# Altium PCB PCB2.PcbDoc
Units mil, origin at the board's own origin, x right, y up, seen from the top; angles counter-clockwise.
Board outline 2225.94 x 1981.76 mil, 2 copper layers (Top Layer, Bottom Layer); 49 components, 58 nets, 197 pads, 41 vias.
Unrouted connection lines stored in the file: 28.
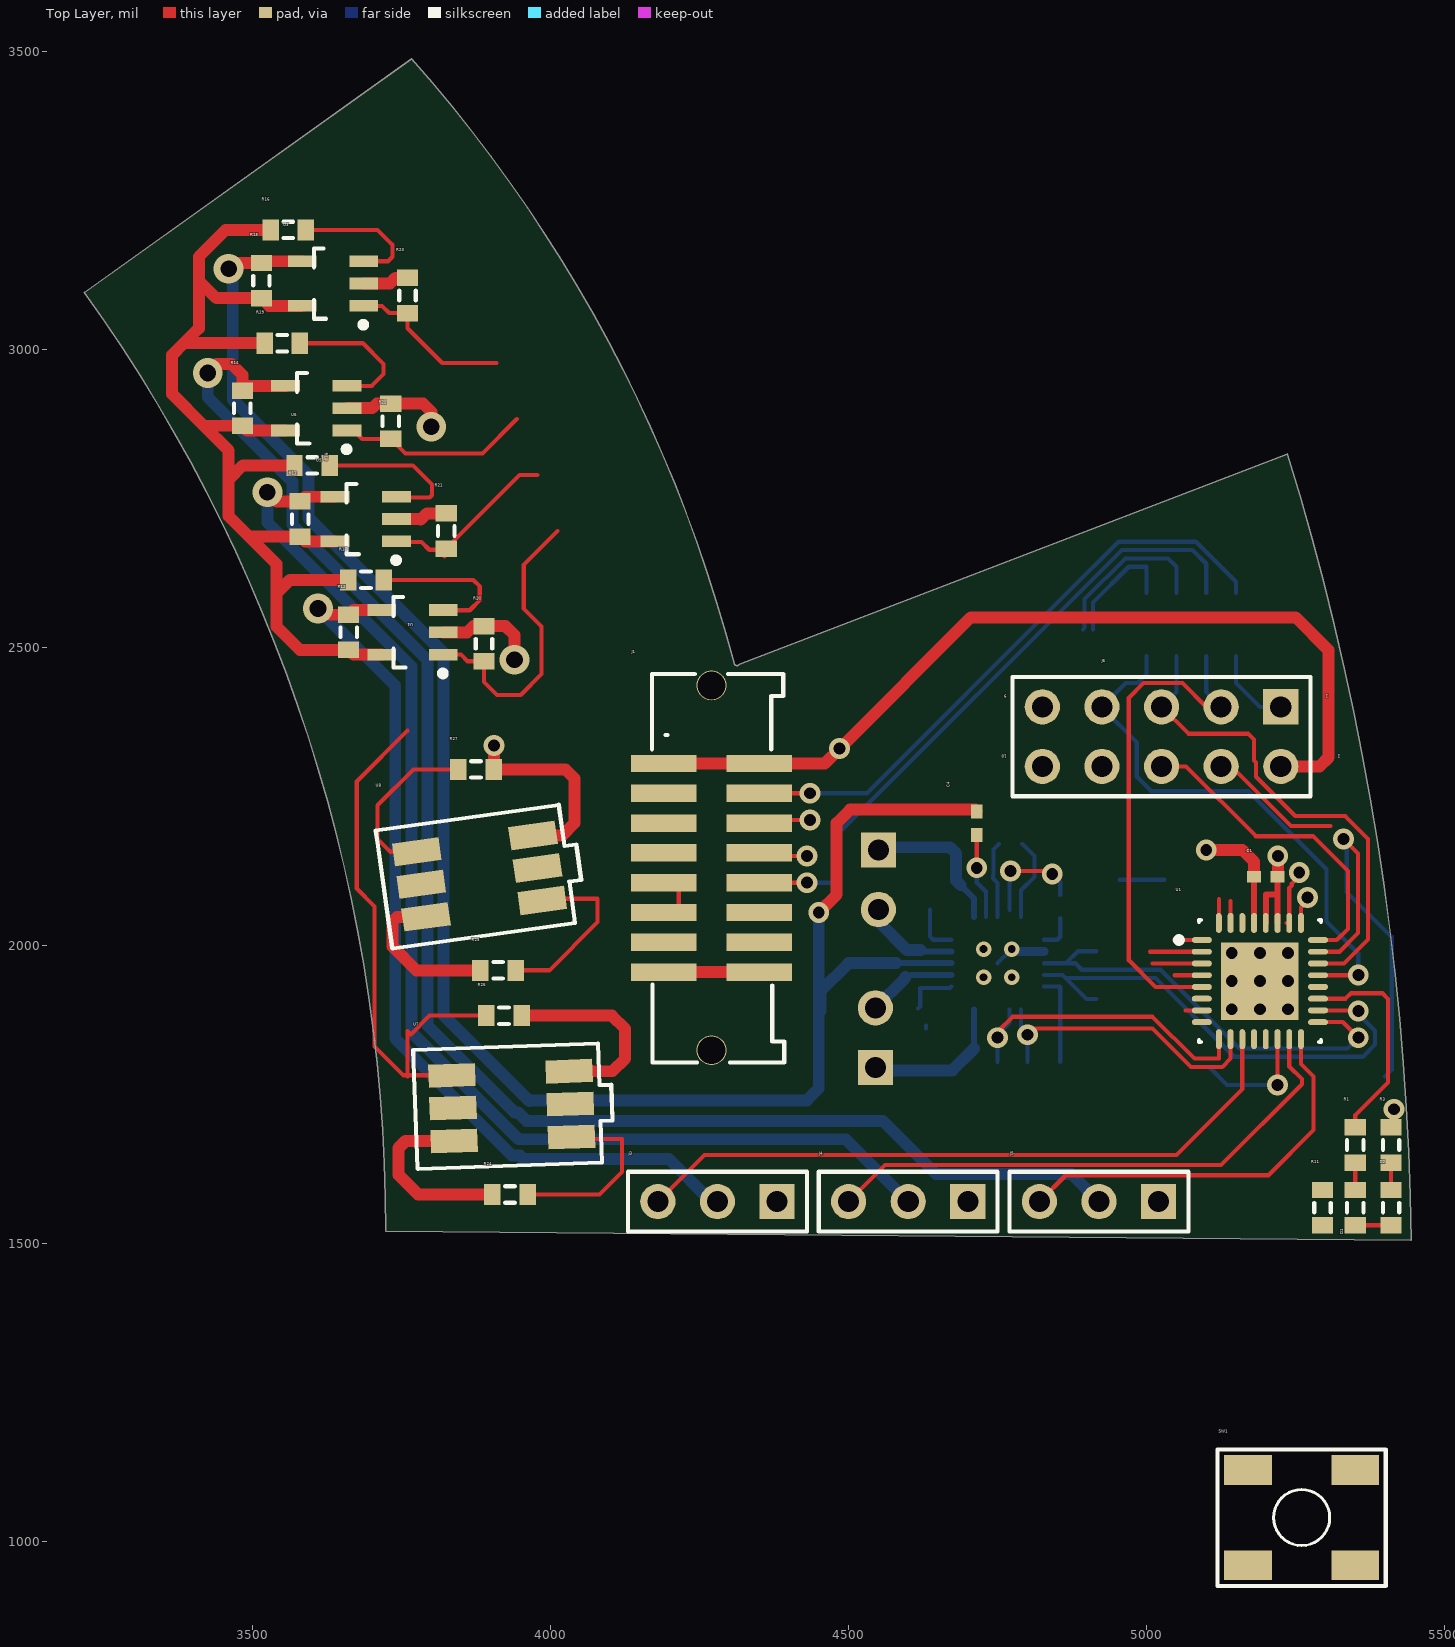
[diagram p0: Top Layer view]
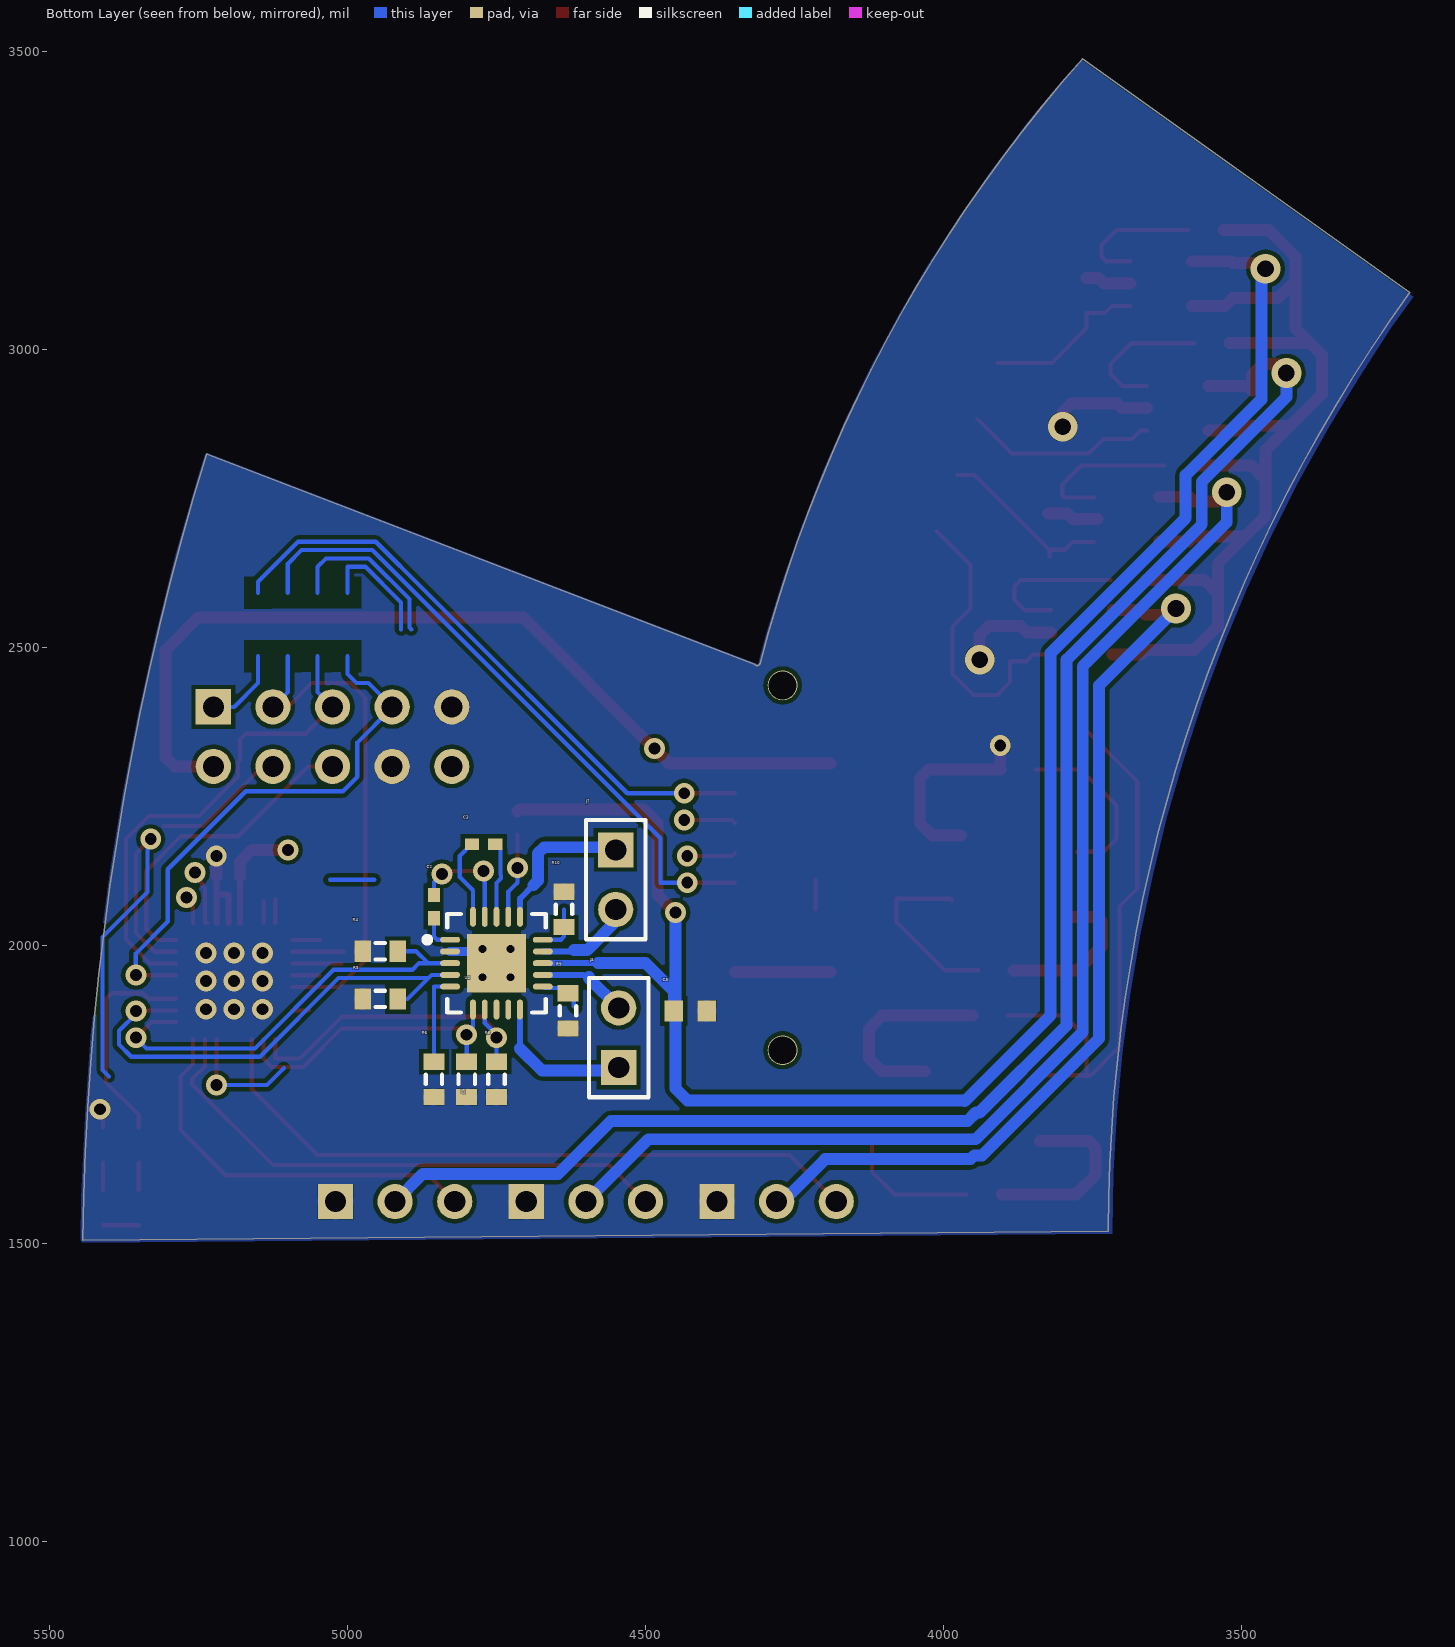
[diagram p1: Bottom Layer view, seen from below]

## Layer stack, top to bottom
Top Layer: signal copper 1.4
Dielectric: dielectric 12.6, FR-4, Dk 4.8
Bottom Layer: signal copper 1.4

## Board outline
3723.44,1519.91 ccw(c3718.43,1520) 3723.44,1519.99 ccw(c1023.38,1522.32) 3723.44,1522.32 ccw(c1023.38,1522.32) 3218.07,3095.12 3767.18,3486.93 cw(c1924.22,1852.95) 4307.91,2472.94 ccw(c4312.77,2474.2) 4316.98,2471.48 5235.25,2823.97 ccw(c5233.46,2828.65) 5236.11,2824.4 cw(c764.4,1443.71) 5444.01,1505.17

## Design rules (kind name [scope] priority, off if disabled: settings)
Clearance ClearanceGND [InNet('GND') vs InNet('GND')] p1: gap=0
Clearance ClearanceJ2 [InComponent('J2') vs Not InNet('GND')] p2: gap=0
Clearance ClearanceU7toU7 [InComponent('U7') vs InComponent('U7')] p3: gap=0
Clearance ClearanceU2toU2 [InComponent('U2') vs InComponent('U2')] p4: gap=0
Clearance ClearanceU1toU1 [InComponent('U1') vs InComponent('U1')] p5: gap=0
Clearance [All] p6: gap=7
ComponentClearance ComponentClearance_1 [InComponent('J6')   or InComponent('J2')] p1: gap=0 collisioncheckmode=3 verticalgap=10 showdistances=FALSE
ComponentClearance [All] p2: gap=10 collisioncheckmode=3 verticalgap=10 showdistances=FALSE
HoleToHoleClearance HoleToHoleClearanceComponentU2 [InComponent('U2') vs InComponent('U2')] p1: gap=0 allowstackedmicrovias=TRUE
HoleToHoleClearance [All] p2: gap=7 allowstackedmicrovias=TRUE
MinimumSolderMaskSliver [All] p1: minsoldermaskwidth=7
PolygonConnect [All] p1: connectstyle=Relief reliefconductorwidth=10 reliefentries=4 polygonreliefangle="90 Angle"
RoutingVias [All] p1: holewidth=20 width=35 viastyle="Through Hole" minholewidth=20 minwidth=35 maxholewidth=28 maxwidth=50
SMDNeckDown [All] p1: percent=80.000
SilkToSilkClearance [All] p1: silktosilkclearance=0
SilkscreenOverComponentPads [All] p1: minsilkscreentomaskgap=0
SolderMaskExpansion [All] p1: expansion=4
Width "Schematic Width Constraint_3" [InNet('MOT0_B')] p1: maxlimit=25 minlimit=10 preferedwidth=20 minimp=50.000000 maximp=50.000000 favimp=50.000000
Width "Schematic Width Constraint_2" [InNet('MOT0_A')] p2: maxlimit=25 minlimit=10 preferedwidth=20 minimp=50.000000 maximp=50.000000 favimp=50.000000
Width "Schematic Width Constraint_1" [InNet('MOT1_A')] p3: maxlimit=25 minlimit=10 preferedwidth=20 minimp=50.000000 maximp=50.000000 favimp=50.000000
Width "Schematic Width Constraint" [InNet('MOT1_B')] p4: maxlimit=25 minlimit=10 preferedwidth=20 minimp=50.000000 maximp=50.000000 favimp=50.000000
Width "Schematic Width Constraint_VBAT" [InNet('VBAT')] p5: maxlimit=25 minlimit=10 preferedwidth=20 minimp=50.000000 maximp=50.000000 favimp=50.000000
Width "Schematic Width Constraint_GND" [InNet('GND')] p6: maxlimit=25 minlimit=10 preferedwidth=20 minimp=50.000000 maximp=50.000000 favimp=50.000000
Width "Schematic Width Constraint_33V" [InNet('3.3V')] p7: maxlimit=25 minlimit=10 preferedwidth=20 minimp=50.000000 maximp=50.000000 favimp=50.000000
Width Width_SERVOPOWER [InNet('SERVO0_POWER')  or  InNet('SERVO1_POWER')  or    InNet('SERVO2_POWER')  or    InNet('MOTOR_POWER')] p8: maxlimit=30 minlimit=10 preferedwidth=20
Width [All] p9: maxlimit=10 minlimit=7 preferedwidth=7
23 further rules are at their usual default settings.

## Components (designator, comment, footprint, x,y, rotation, side; value= is the part's Value field where it differs from the comment)
C1 "Cap Semi" CAPC1005L 5200,2115 r180 top
C2 "Cap Semi" CAPC1005L 4855,2065 r90 bottom
C3 "Cap Semi" CAPC1005L 4771.68,2169.69 r0 bottom
C4 "Cap Semi" CAPC1005L 4715,2205 r90 top
C5 "Cap Semi" CAPC1608L 4425,1890 r0 bottom
D1 "Heartbeat" SurfaceMount(603) 5350,1560 r90 top
D2 "Power LED" SurfaceMount(603) 5410,1560 r90 top
J1 "header" "HEADERSM 8X2" 4270,2130 r0 top
J3 "Header 3" HDR1X3 4380,1570 r180 top
J4 "Header 3" HDR1X3 4700,1570 r180 top
J5 "Header 3" HDR1X3 5020,1570 r180 top
J6 "JTAG" HDR2X5 5225,2400 r180 top
J7 "Header 2" HDR1X2 4550,2160 r270 bottom
J8 "Header 2" HDR1X2 4545,1795 r90 bottom
R1 "DiodeRes" J1-0603 5350,1665 r90 top
R3 "DiodeRes" J1-0603 5410,1665 r90 top
R4 "MotorRes" J1-0603 4945,1990 r0 bottom
R5 "MotorRes" J1-0603 4945,1910 r0 bottom
R6 "MotorRes" J1-0603 4855,1775 r270 bottom
R7 "MotorRes" J1-0603 4800,1775 r270 bottom
R8 "MotorRes" J1-0603 4750,1775 r270 bottom
R9 "MotorCurrentRes" J1-0603 4630,1890 r270 bottom
R10 "MotorCurrentRes" J1-0603 4636.68,2060.16 r90 bottom
R11 "ResetRes" J1-0603 5295,1560 r90 top
R12 "RLOAD" J1-0603 3661.43,2525 r270 top
R13 "RLOAD" J1-0603 3580,2715 r270 top
R14 "RLOAD" J1-0603 3483,2901 r90 top
R15 "RLOAD" J1-0603 3515,3115 r90 top
R16 "R_IN" J1-0603 3560,3200 r0 top
R17 "R_IN" J1-0603 3690.43,2613 r0 top
R18 "R_IN" J1-0603 3600,2805 r0 top
R19 "R_IN" J1-0603 3550,3010 r0 top
R20 "R_OUT" J1-0603 3888.43,2506 r270 top
R21 "R_OUT" J1-0603 3825,2695 r270 top
R22 "R_OUT" J1-0603 3732,2879 r90 top
R23 "R_OUT" J1-0603 3760,3090 r90 top
R24 "RLOAD" J1-0603 3932,1582 r0 top
R25 "RLOAD" J1-0603 3912,1958 r0 top
R26 "RLOAD" J1-0603 3922,1882 r0 top
R27 "RLOAD" J1-0603 3875,2295 r0 top
SW1 "Switch-TL330" SwitchTall-TL330 5260,1040 r180 top
U1 "MSP430G2553" QFN-32 5190,1940 r0 top
U2 "MOTOR-A3906" QFN-20 4750,1970 r180 bottom
U3 "LT6106" TSOT-23-5_LT6106 3635,3110 r180 top
U4 "LT6106" TSOT-23-5_LT6106 3768.43,2525 r180 top
U5 "LT6106" TSOT-23-5_LT6106 3690,2715 r180 top
U6 "LT6106" TSOT-23-5_LT6106 3607,2901 r180 top
U7 "absoluteEncoder" absoluteEncoder 4043,1734 r182 top
U8 "absoluteEncoder" absoluteEncoder 3988,2131 r188 top

## Footprints (in the part's own frame and the unit in brackets; to place one, negate y for a bottom-side part, rotate by r counter-clockwise, add the part's x,y. Pads: shape width x height; smd on the part's side, far side on the other; paste and mask are expansions set on the pad)
absoluteEncoder [mm] "Absolute Encoder EE-SX1131"
  rect 2x1 smd: A(0.25,1.4) C(5.25,1.4) E1(5.25,0) E2(5.25,-1.4) K(0.25,-1.4) NC(0.25,0)
  silkscreen extent -1.52,-2.54 6.86,2.54
CAPC1005L [mm] "Chip Capacitor, Body 1.0x0.5mm, IPC High Density"
  rect 0.6x0.5 smd: 1(-0.5,0) 2(0.5,0)
  body extent -0.55,-0.3 0.55,0.3, height 1.3
CAPC1608L [mm] "Chip Capacitor, Body 1.6x0.8mm, IPC High Density"
  rect 0.8x0.9 smd: 1(-0.7,0) 2(0.7,0)
  body extent -0.87,-0.48 0.87,0.48, height 1.3
HDR1X2 [mm] "Connector; Header; 2 Position"
  rect 1.5x1.5 hole 0.9: 1(0,0)
  round 1.5 hole 0.9: 2(2.54,0)
  silkscreen extent -1.27,-1.27 3.81,1.27
HDR1X3 [mm] "Connector; Header; 3 Position"
  rect 1.5x1.5 hole 0.9: 1(0,0)
  round 1.5 hole 0.9: 2(2.54,0) 3(5.08,0)
  silkscreen extent -1.27,-1.27 6.35,1.27
HDR2X5 [mm] "Connector; Header; 5x2 Position"
  rect 1.5x1.5 hole 0.9: 1(0,0)
  round 1.5 hole 0.9: 2(0,2.54) 3(2.54,0) 4(2.54,2.54) 5(5.08,0) 6(5.08,2.54) 7(7.62,0) 8(7.62,2.54) 9(10.16,0) 10(10.16,2.54)
  silkscreen extent -1.27,-1.27 11.43,3.81
"HEADERSM 8X2" [mm]
  rect 2.795x0.74 smd: 1(-2.033,4.445) 2(2.033,4.445) 3(-2.033,3.175) 4(2.033,3.175) 5(-2.033,1.905) 6(2.033,1.905) 7(-2.033,0.635) 8(2.033,0.635) 9(-2.033,-0.635) 10(2.033,-0.635) 11(-2.033,-1.905) 12(2.033,-1.905) 13(-2.033,-3.175) 14(2.033,-3.175) 15(-2.033,-4.445) 16(2.033,-4.445)
  round 1.27 hole 1.19: c1(0,7.773) c2(0,-7.773)
  silkscreen extent -2.54,-8.29 3.1,8.25
J1-0603 [mm] "Chip Resistor, Body 1.6x0.8mm, IPC High Density"
  rect 0.7x0.9 smd: 1(-0.75,0) 2(0.75,0)
  silkscreen extent -0.2,-0.35 0.2,0.35, body extent -0.85,-0.48 0.85,0.48, height 0.9
QFN-20 [mm] "QFN, 20-Leads, Body 4.2x4.2mm (max), Pitch 0.50mm, IPC Medium Density"
  oval 0.85x0.25 smd: 1(-1.975,1) 2(-1.975,0.5) 3(-1.975,0) 4(-1.975,-0.5) 5(-1.975,-1) 11(1.975,-1) 12(1.975,-0.5) 13(1.975,0) 14(1.975,0.5) 15(1.975,1)
  oval 0.25x0.85 smd: 6(-1,-1.975) 7(-0.5,-1.975) 8(0,-1.975) 9(0.5,-1.975) 10(1,-1.975) 16(1,1.975) 17(0.5,1.975) 18(0,1.975) 19(-0.5,1.975) 20(-1,1.975)
  rect 2.5x2.5 smd: 21(0,0)
  silkscreen extent -3.08,-2.1 2.1,2.1, body extent -2.07,-2.07 2.07,2.07, height 0.8
QFN-32 [mm] "QFN, 32-Leads, Body 5.2x5.2mm (max), Pitch 0.50mm, IPC Medium Density"
  oval 0.85x0.25 smd: 1(-2.475,1.75) 2(-2.475,1.25) 3(-2.475,0.75) 4(-2.475,0.25) 5(-2.475,-0.25) 6(-2.475,-0.75) 7(-2.475,-1.25) 8(-2.475,-1.75) 17(2.475,-1.75) 18(2.475,-1.25) 19(2.475,-0.75) 20(2.475,-0.25) 21(2.475,0.25) 22(2.475,0.75) 23(2.475,1.25) 24(2.475,1.75)
  oval 0.25x0.85 smd: 9(-1.75,-2.475) 10(-1.25,-2.475) 11(-0.75,-2.475) 12(-0.25,-2.475) 13(0.25,-2.475) 14(0.75,-2.475) 15(1.25,-2.475) 16(1.75,-2.475) 25(1.75,2.475) 26(1.25,2.475) 27(0.75,2.475) 28(0.25,2.475) 29(-0.25,2.475) 30(-0.75,2.475) 31(-1.25,2.475) 32(-1.75,2.475)
  rect 3.3x3.3 smd: 33(0,0)
  silkscreen extent -3.57,-2.6 2.6,2.6, body extent -2.57,-2.58 2.58,2.57, height 1
SurfaceMount(603) [mm]
  rect 0.7x0.9 smd: 1(-0.75,0) 2(0.75,0)
  silkscreen extent -0.2,-0.35 0.2,0.35, body extent -0.85,-0.48 0.85,0.48, height 0.9
SwitchTall-TL330 [mil] "Small SMDTall Tact Switch E-Switch TL330"
  rect 80x50 smd: 1(-90,80) 2(90,80) 3(-90,-80) 4(90,-80)
  silkscreen extent -141,-114 141,115
TSOT-23-5_LT6106 [mm] "A SOT-23 package with 5 pins for LT6106"
  rect 1.22x0.5 smd: 1(-1.31,0.95) 2(-1.31,0) 3(-1.31,-0.95) 4(1.31,-0.95) 5(1.31,0.95)
  silkscreen extent -1.42,-1.5 0.81,1.88, body extent -0.81,-1.5 0.84,1.5, height 1.2

## Part data
C1 C2 C3 C4 C5: "Capacitor (Semiconductor SIM Model)"
D1 D2: library part LED
J1: library part "HEADER 8X2"
J3 J4 J5: "Header, 3-Pin"
J6: library part "Header 5X2", "Header, 5-Pin, Dual row"
J7 J8: "Header, 2-Pin"
R1 R3 R4 R5 R6 R7 R8 R9 R10 R11 R12 R13 R14 R15 R16 R17 R18 R19 R20 R21 R22 R23 R24 R25 R26 R27: library part Res3, "Resistor"
U3 U4 U5 U6: "Current Sense Amplifier"

## Via types
v1: diameter 35, hole 20, Top Layer to Bottom Layer, 31 vias
v2: diameter 50, hole 28, Top Layer to Bottom Layer, 6 vias
v3: diameter 25.98, hole 12.99, Top Layer to Bottom Layer, tented top, 4 vias

## Nets (pads, with @x,y where several pads share a name; then routed paths per layer and width w, separated by ;. In a path a pad name is that pad's centre, name@x,y a point inside that pad or via, vN(x,y) a via of type N, cw(c..) or ccw(c..) an arc to the next point about the centre after c; other vN are vias at no path point)
3.3V: C1.2 D1.1 D2.1 J1.1 J1.2 J6.2 R11.1 U1.29 U1.30 | length 1781.8
  Top Layer w7: D1.1 D2.1
  Top Layer w10: U1.29 5180.16,2140.16
  Top Layer w20: J1.1 J1.2 4460,2305 v1(4485,2330) 4705,2550 5250,2550 5305,2495 5305,2315 5290,2300 J6.2 ; v1(5100,2160) 5160.31,2160 5180.16,2140.16 5180.31,2140 C1.2
ADC_GPIO0: R20.2 U1.31 U4.1 | length 540.4
  Top Layer w7: U4.1 3849.83,2487.6 3860.95,2476.47 R20.2 3888.43,2441.57 3910,2420 3950,2420 3985,2455 3985,2535 3955,2565 3955,2637.94 4011.83,2694.77 ; U1.31 5140.79,2074.21
ADC_GPIO1: R21.2 U1.3 U5.1 | length 377.6
  Top Layer w7: U5.1@3747.57,2676.6 3783.4,2676.6 3796.53,2663.47 3822,2663.47 R21.2@3822,2652 ; R21.2 3948.26,2788.74 3977.63,2788.74 ; 5010,1969.53 U1.3
FTDI_RX: J1.5
FTDI_TX: J1.7
GND: C1.1 C5.1 J1.15 J1.16 J3.1 J4.1 J5.1 J6.8 J6.9 R3.2 R4.2 R5.2 R6.2 R7.2 R8.2 R9.2 R10.2 R20.1 R21.1 R22.2 R23.2 R26.2 R27.2 SW1.4 U1.27 U1.28 U1.33 U2.2 U2.21 U3.2 U4.2 U5.2 U6.2 U7.K U8.K | length 1646.4
  Top Layer w7: v1@3904.53,2334.53 v1(3905,2335) ; R3.2 5410,1720 v1(5415,1725)
  Top Layer w10: U1.28 5199.84,2085 5219.53,2085 ; U1.27 5219.53,2085 ; C1.1@5219.53,2115 5219.53,2085
  Top Layer w20: U6.2 3701,2901 3708.53,2908.53 R22.2 3786.47,2908.53 3800,2895 v2(3800,2870) ; U3.2 3730.47,3110 3740,3119.53 R23.2 ; U5.2 3781,2715 3782,2714 3792.53,2724.53 R21.1 ; U4.2 3860,2525 3870.53,2535.53 R20.1 3924.47,2535.53 3939.43,2520.57 v2(3939.43,2479) ; v1(3905,2335) 3905,2295.47 R27.2 4025,2295 4040,2280 4040,2205 4019.21,2184.21 U8.K ; R26.2 4103,1882 4125,1860 4125,1810 4103.74,1788.74 U7.K ; J1.15 J1.16 ; C1.1 5220,2115.31 v1(5220,2150)
  Bottom Layer w7: R9.2 R9.2@4630,1865.47 ; U2.21 U2.21@4769.68,1989.69
  Bottom Layer w15: U2.21@4769.68,1989.69 U2.2
  other v1: 5142.76,1892.76 5190,1892.76 5237.24,1892.76 5142.76,1940 5190,1940 5237.24,1940 5142.76,1987.24 5190,1987.24 5237.24,1987.24
  other v3: 4726.38,1946.38 4773.62,1946.38 4726.38,1993.62 4773.62,1993.62
GPIO0: U1.7 | length 27.6
  Top Layer w7: 5065,1890.79 U1.7
GPIO1: U1.6
GPIO2: U1.12
GPIO3: U1.13
GPIO4: R26.1 U1.26 U7.E2 | length 1051.6
  Top Layer w7: 3760,2360 3675,2275 3675,2095 3705,2065 3705,1830 3753.13,1781.87 3760,1781.87 ; U7.E2 3761.87,1781.87 ; R26.1 3797,1882 3765.69,1850.69 3760,1856.38 3760,1781.87 ; U1.26@5235.03,2037.44 U1.26 5239.21,2095.9 5243.5,2100.19 5243.5,2103.5 5256,2116 v1(5256,2122) ; 3760,1781.87 3761.87,1781.87 ; 3760,1781.87 3760,1780 3761.87,1781.87
  Bottom Layer w7: v1(5256,2122) v1@5256,2124
GPIO5: R27.1 U1.25 U8.E2 | length 338.5
  Top Layer w7: U8.E2 3731.82,2156.82 3710,2178.63 3710,2235 3770,2295 R27.1 ; U1.25 5258.9,2063.9 5270,2075 v1(5270,2080)
I2C_SCL: J1.13
I2C_SDA: J1.14
JTAG_BOTTOM_TCK_SPI_CLK: J1.4 J6.1 U1.4 | length 1203.4
  Top Layer w7: J1.4 v1(4435,2255) ; 5046.88,1949.84 U1.4
  Bottom Layer w7: v1(4435,2255) 4530.6,2255 4868,2592.4 4952.6,2677 5082.8,2677 5150,2609.8 5150,2591.3 ; 5150,2485 5150,2439.86 5189.86,2400 J6.1
JTAG_BOTTOM_TDI_ADC_GPIO2: J6.7 R22.1 U1.21 U6.1 | length 1242.1
  Top Layer w7: U6.1 3670,2863.6 3684.13,2849.47 R22.1 3756.47,2825 3885.72,2825 3943.42,2882.71 ; U1.21 5354.84,1949.84 v1(5355,1950)
  Bottom Layer w7: J6.7@4925,2398.47 4983.47,2340 4983.47,2282.8 5007.8,2258.47 5170.53,2258.47 5301.5,2127.5 5301.5,2040 5355,1986.5 v1(5355,1950) ; J6.7 4965,2440 4985,2440 5000,2455 5000,2485
JTAG_BOTTOM_TDO_ADC_GPIO3: J6.5 R23.1 U1.22 U3.1 | length 1114.6
  Top Layer w7: U3.1 3717.4,3072.6 3729.53,3060.47 R23.1 3760,3035 3818.32,2976.68 3909.22,2976.68 ; J6.5 5070,2355 5170,2355 5180,2345 5180,2310 5183.47,2306.53 5183.47,2282.8 5249.27,2217 5333,2217 5371.5,2178.5 5371.5,2009.98 5331.05,1969.53 U1.22
  Bottom Layer w7: J6.5 5050,2425 5050,2485
JTAG_BOTTOM_TEST: J6.6 U1.24 | length 539.9
  Top Layer w7: J6.6 5066.11,2300 5183.11,2183 5278.94,2183 5337.5,2124.44 5337.5,2027.5 5318.9,2008.9 U1.24
JTAG_BOTTOM_TMS_SPI_SEL_EXPAND0: J1.10 J6.3 U1.5 | length 1948.5
  Top Layer w7: J1.10 4425,2105 4430,2110 v1(4430,2105) ; U1.5 5014.84,1930.16 4970,1975 4970,2415 4995.03,2440.03 5059.97,2440.03 5100,2400 J6.3
  Bottom Layer w7: v1(4430,2105) 4475,2105 4475,2179.6 4958.4,2663 5077,2663 5100,2640 5100,2591.3 ; 5100,2485 5100,2425 J6.3
LED_HEARTBEAT: R1.2 U1.19 | length 363.5
  Top Layer w7: U1.19 5333.75,1910.47 5342.78,1919.5 5395.5,1919.5 5405,1910 5405,1770 5350,1715 R1.2
MOT0_A: J7.1 U2.16 | length 255.5
  Bottom Layer w10: 4688.16,2100.73 4710.63,2078.26 U2.16
  Bottom Layer w20: J7.1 4554.5,2164.5 4670.13,2164.5 4680.5,2154.13 4680.5,2108.39 4688.16,2100.73
MOT0_B: J7.2 U2.14 | length 162.1
  Bottom Layer w10: 4620.31,1989.69 U2.14
  Bottom Layer w20: J7.2 4550,2040 4598,1992 4620.31,1992
MOT0_CUR: R10.1 U2.15 | length 83.2
  Bottom Layer w7: 4636.68,2060.16 4636.68,2014.69 4642,2009.37 U2.15
MOT0_PWMA: R5.1 U1.18 U2.4 | length 896.2
  Top Layer w7: U1.18 5354.21,1890.79 v1(5355,1890)
  Bottom Layer w7: U2.4 4858.73,1950.32 4865.48,1943.56 ; R5.1 4899.04,1910 4865.48,1943.56 ; 4955,2110 5029.5,2110 ; v1(5355,1890) 5355,1884.6 5383,1856.6 5383,1833.4 5362.6,1813 5147,1813 5015,1945 4866.92,1945 4865.48,1943.56
MOT0_PWMB: R6.1 U1.14 U2.5 | length 354.7
  Top Layer w7: v1(5219.53,1765.47) U1.14
  Bottom Layer w7: U2.5 4854.37,1930.63 4855,1930 4855,1860 R6.1 ; 5106.6,1793.84 5134.96,1765.47 v1(5219.53,1765.47)
MOT1_A: J8.1 U2.10 | length 248.2
  Bottom Layer w10: 4710.63,1826.84 U2.10
  Bottom Layer w20: J8.1 4549.81,1790.19 4673.98,1790.19 4710.63,1826.84
MOT1_B: J8.2 U2.12 | length 139.8
  Bottom Layer w10: 4605,1950.32 U2.12
  Bottom Layer w20: J8.2 4595,1945 4595,1946.82
MOT1_CUR: R9.1 U2.11 | length 88.5
  Bottom Layer w7: 4616.68,1894.21 4620.31,1897.84 4620.31,1928.32 4669.93,1928.32 U2.11
MOT1_PWMA: R7.1 U1.10 U2.6 | length 512.1
  Top Layer w7: v1(4800,1850) 4795,1850 4805.2,1860.2 5010,1860.2 5074.2,1796 5126.9,1796 5140.79,1809.89 U1.10
  Bottom Layer w7: U2.6 4789.37,1860.63 v1(4800,1850) R7.1
MOT1_PWMB: R8.1 U1.9 U2.7 | length 548.9
  Top Layer w7: v1(4750,1845) 4750,1855 4775,1880 5010,1880 5080,1810 5121.1,1810 U1.9
  Bottom Layer w7: R8.1 v1(4750,1845) 4750,1850 4769.68,1869.68 U2.7
MOT_SLEEP: R4.1 U1.17 U2.3 | length 731.1
  Top Layer w7: U1.17 5328.9,1871.1 v1(5355,1845)
  Bottom Layer w7: U2.3 4865,1970 ; R4.1 4885,1990 4865,1970 ; v1(5355,1845) 5337,1827 5155.28,1827 5023.28,1959 4891.14,1959 4880.14,1970 4865,1970
MOTOR_POWER: C4.2 C5.2 R15.2 U2.13 U3.4 | length 3206.3
  Top Layer w20: v2(3460,3135) 3469.53,3144.53 R15.2 3517.87,3147.4 U3.4 ; v1(4450,2055) 4480,2085 4480,2205 4502.5,2227.5 4712.5,2227.5 4715,2225 C4.2
  Bottom Layer w7: U2.13@4671.93,1969.69 U2.13
  Bottom Layer w10: 4580,1970 U2.13
  Bottom Layer w20: v2(3460,3135) 3467,3128 3467,2915.58 3594,2788.58 3594,2716.76 3820.5,2490.26 3820.5,1882.82 3964.73,1738.59 3966.14,1740 4430,1740 4450,1760 4450,1922.44 ; v1(4450,2055) 4450,1922.44 ; C5.2 4452.56,1922.61 ; 4580,1970 4499.95,1970 4452.56,1922.61 ; 4450,1922.44 4452.39,1922.44 4452.56,1922.61
NetC2_1: C2.1 U2.1 | length 60.3
  Bottom Layer w7: U2.1 4850,2009.37 4855,2014.37 C2.1
NetC2_2: C2.2 U2.19 | length 178.4
  Top Layer w7: v1(4771.68,2124.69) 4836.68,2124.69 v1(4841.68,2119.69)
  Bottom Layer w7: U2.19@4769.68,2059.69 4769.68,2122.69 v1(4771.68,2124.69) ; v1(4841.68,2119.69) 4855,2106.37 C2.2
NetC3_1: C3.1 U2.18 | length 129.2
  Bottom Layer w7: U2.18 4750,2104.65 4742.18,2112.47 4742.18,2117.59 4743,2118.4 4743,2160.69 C3.1
NetC3_2: C3.2 U2.20 | length 139.8
  Bottom Layer w7: U2.20 4789.37,2092.37 4811.68,2114.69 4811.68,2149.69 4791.68,2169.69 C3.2
NetC4_1: C4.1 U2.17 | length 134.5
  Top Layer w7: v1(4715,2130) C4.1
  Bottom Layer w7: v1@4715,2120.32 4715,2105 4730,2090 ; U2.17 4730.31,2089.69 4730,2090 ; 4730.31,2090 4730,2090
NetD1_2: D1.2 R1.1 | length 45.9
  Top Layer w7: D1.2 R1.1
NetD2_2: D2.2 R3.1 | length 45.9
  Top Layer w7: D2.2 R3.1
NetR11_2: R11.2 SW1.2
NetR16_2: R16.2 U3.3 | length 227.4
  Top Layer w7: R16.2 3710,3200 3735,3175 3735,3155 3727.4,3147.4 U3.3
NetR17_2: R17.2 U4.3 | length 257.7
  Top Layer w7: R17.2 3870.43,2613 3881.43,2602 3881.43,2579 3864.43,2562 3820.4,2562 U4.3
NetR18_2: R18.2 U5.3 | length 257.6
  Top Layer w7: R18.2 3769,2805 3801,2773 3801,2755 3797.4,2751.4 U5.3@3747.57,2751.4
NetR19_2: R19.2 U6.3 | length 241.3
  Top Layer w7: R19.2 3685,3010 3720,2975 3720,2958.4 3700,2938.4 U6.3
NetR24_2: R24.2 U7.A | length 315.6
  Top Layer w7: R24.2 4082,1582 4120,1620 4120,1675 4038.66,1675 U7.A
NetR25_2: R25.2 U8.A | length 304.3
  Top Layer w7: R25.2 3998,1958 4079,2039 4079,2078 3988.88,2078 U8.A
RESET: J1.3
RESET_430: J6.4 SW1.1 U1.23 | length 909.1
  Top Layer w7: J6.4 5142.23,2300 5242.23,2200 5308.28,2200 ; U1.23 5323.25,1989.21 5354.5,2020.46 5354.5,2153.78 v1(5330,2178.28)
  Bottom Layer w7: v1(5330,2178.28) 5335.5,2172.78 5335.5,2089.5 5411,2014 5411,1791 5400,1780
SERVO0: J3.3 U1.11 | length 1142.5
  Top Layer w7: J3.3 4258.28,1648.28 5050,1648.28 5160.47,1758.75 U1.11
SERVO0_POWER: J3.2 R12.1 U4.4 | length 1543.5
  Top Layer w20: v2(3610,2565) 3620.47,2554.53 R12.1 3669.3,2562.4 U4.4
  Bottom Layer w20: v2(3610,2565) 3739.5,2435.5 3739.5,1843.33 3935.14,1647.68 3948.5,1647.68 3955,1641.18 4198.82,1641.18 4270,1570 J3.2
SERVO1: J4.3 U1.15 | length 926.5
  Top Layer w7: J4.3 4561.28,1631.28 5124.93,1631.28 5260.48,1766.83 5260.48,1775.48 5239.21,1796.75 U1.15
SERVO1_POWER: J4.2 R13.1 U5.4 | length 2090
  Top Layer w20: v2(3525,2760) 3540.47,2744.53 R13.1 3587.88,2752.4 U5.4
  Bottom Layer w7: J4.2@4605,1560 J4.2@4605,1570
  Bottom Layer w20: v2(3525,2760) 3525,2709.4 3766.5,2467.9 3766.5,1854.51 3946.32,1674.68 4495.32,1674.68 J4.2
SERVO2: J5.3 U1.16 | length 671
  Top Layer w7: J5.3 4864.28,1614.28 5204.28,1614.28 5280,1690 5280,1780 5258.9,1801.1 U1.16
SERVO2_POWER: J5.2 R14.2 U6.4 | length 2669.8
  Top Layer w20: v2(3425,2960) 3440,2975 3465,2975 3483,2957 R14.2 3490.87,2938.4 U6.4
  Bottom Layer w20: v2(3425,2960) 3425,2919.4 3567,2777.4 3567,2705.58 3793.5,2479.08 3793.5,1865.69 3939.69,1719.5 3945.64,1719.5 3959.64,1705.5 4557.56,1705.5 4646.53,1616.53 4873.47,1616.53 J5.2
SPI_MISO: J1.6 U1.1 | length 133.5
  Top Layer w7: J1.6 4355.02,2210 v1(4435,2210) ; 5046.1,2008.9 U1.1
SPI_MOSI: J1.8 U1.2 | length 179
  Top Layer w7: J1.8 4355.02,2150 v1(4430,2150) ; v1@4430,2160 v1@4440,2160 ; 5005.64,1989.21 U1.2
SPI_SEL_EXPAND1: J1.12
VBAT: J1.9 J1.11 R12.2 R13.2 R14.1 R15.1 R16.1 R17.1 R18.1 R19.1 R24.1 R25.1 U3.5 U4.5 U5.5 U6.5 U7.C U8.C | length 2540.9
  Top Layer w7: J1.11@4214.98,2060 J1.9@4214.98,2110
  Top Layer w20: R19.1 3385,3010 ; R16.1 3455,3200 3410,3155 3410,3115 ; U6.5 3490.87,2863.6 R14.1 3418.53,2871.47 ; R18.1 3484,2805 3460,2781 ; U3.5 3527.87,3072.6 R15.1 3439.53,3085.47 3410,3115 ; U5.5 3587.87,2677.6 R13.2 3494.53,2685.47 ; R17.1 3563,2613 3540,2590 ; U4.5 3669.3,2487.6 R12.2 3579.53,2495.47 3540,2535 3540,2590 ; U8.C 3742.65,2047.65 3735,2040 3735,1998 3775,1958 R25.1 ; U7.C 3756.7,1671.7 3745,1660 3745,1615 3778,1582 R24.1 ; 3385,3010 3410,3035 3410,3115 ; 3385,3010 3365,2990 3365,2925 3418.53,2871.47 ; 3418.53,2871.47 3460,2830 3460,2781 ; 3460,2781 3460,2720 3494.53,2685.47 ; 3494.53,2685.47 3540,2640 3540,2590
pads on no net: J1.c1 J1.c2 J6.10 SW1.3 U1.8 U1.20 U1.32 U2.8 U2.9 U7.E1 U7.NC U8.E1 U8.NC
copper on no net: | length 527.2
  Top Layer w7: 5121.1,2037.44 5121.1,2077.32
  Bottom Layer w7: 4893,2530 4896,2533 4896,2580.8 4964.2,2649 5036,2649 5050,2635 5050,2591.3 ; 4910,2530 4910,2575 4970,2635 5000,2635 5000,2591.3

## Polygon pours and split planes (outlines as drawn)
GND on Bottom Layer "Bottom Layer" (solid, remove dead copper, pour order 2): 3716.61,1515.92 5447.21,1501.1 5447.21,1501.12 ccw(c762.58,1439.69) 5237.51,2826.96 5237.54,2826.9 4310.61,2471.08 4310.71,2471.11 ccw(c1922.4,1848.93) 3769.45,3485.86 3769.38,3485.8 3212.16,3088.2 cw(c1021.57,1518.3)

## Silkscreen, mask and mechanical layers (free items; w line width, h text height)
Mechanical 1:
  lines w0: 3920.28,3494.63 ccw(c3974.02,3410.3) 4027.77,3325.97 ; 4596.91,2800.85 cw(c5549.68,3138.42) 4800.23,3816.69 ; 4679.25,3978.32 cw(c4733,3893.99) 4786.74,3809.66
  lines w7: 3213.98,3092.22 3771.19,3489.82 ; 3718.43,1519.93 5449.02,1505.11 ; 3920.28,3494.63 4679.25,3978.32 ; 4027.77,3325.97 4786.74,3809.66 ; 4065,1516.68 4065,2394
  lines w10: 3213.98,3092.22 cw(c1023.38,1522.32) 3718.43,1520 ; 3771.26,3489.88 cw(c1924.22,1852.95) 4312.53,2475.13 ; 5239.33,2830.97 cw(c764.4,1443.71) 5449.02,1505.14

## Text inside footprints (layer, text, board x,y; h text height)
J6: Top Overlay "2" at 5325,2320 h5 r180; Top Overlay "1" at 5305,2420 h5 r180; Top Overlay "9" at 4765,2420 h5 r180; Top Overlay "10" at 4765,2320 h5 r180